# EAGLE board subwoofer_TDA2030Ax2 (EAGLE 6.0)
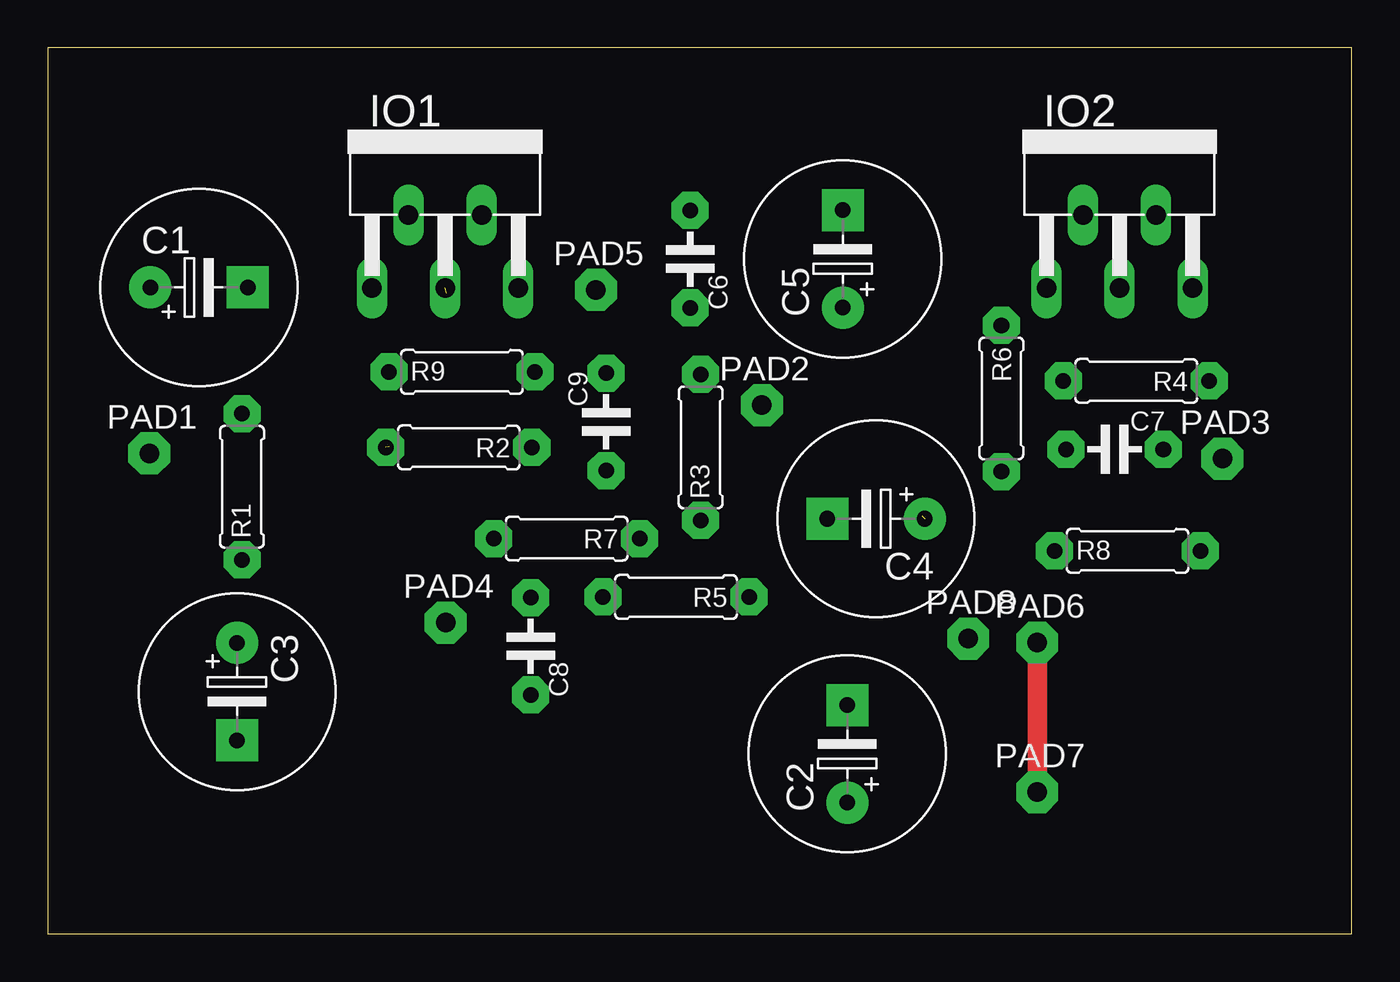
[diagram p0: board, top side]
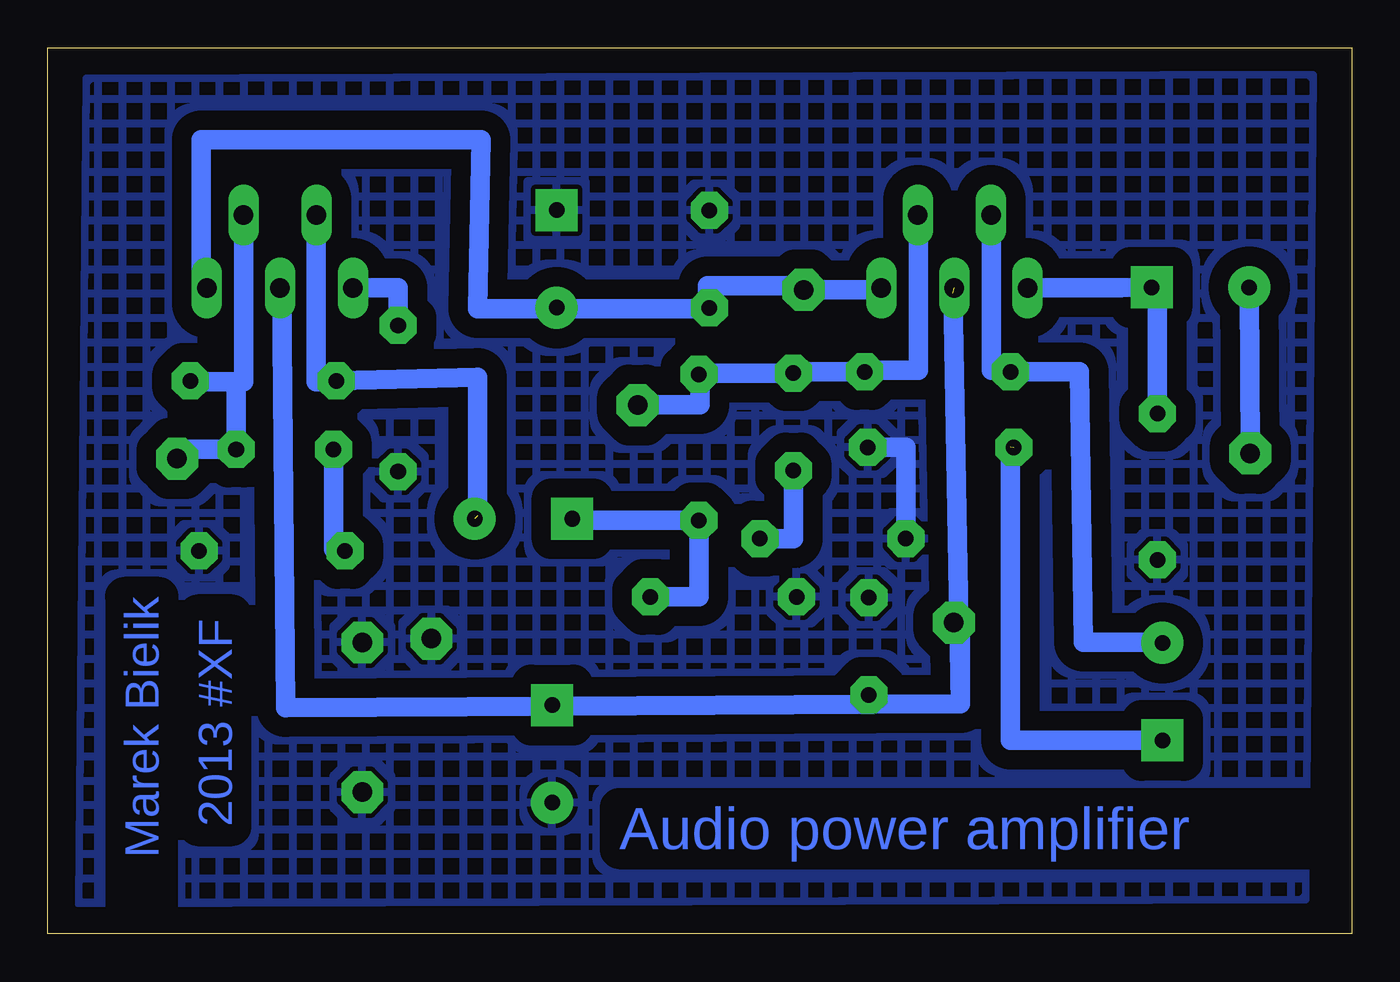
[diagram p1: board, bottom side, seen from below]

Size 68 x 46.2 mm. Coordinates in mm from the lower left corner, seen from the top.
Outline: 0,0 68,0 68,46.2 0,46.2 0,0
Copper layers (1*16): Top 0.035mm / dielectric 1.5mm / Bottom 0.035mm
Design rules: minimum track width 10mil, minimum drill 24mil, track to track 8mil, track to pad 8mil, pad to pad 8mil, via to via 8mil, smd to smd 8mil, copper to edge 40mil, drill to drill 8mil, minimum pad ring 10mil, minimum via ring 8mil, stop-mask expansion 4mil, vias tented up to drill 0mil, thermal gap 10mil

## Footprints (pad centres in the part's own frame; a part is rotated, then mirrored left to right if it is on the bottom)
C-EL_5 = drill 0.813 pad 2.184: C+ -2.54,0 | drill 0.813 pad 2.184 square: C- 2.54,0
C-5 = drill 0.813 pad 1.93 octagon: 1 -2.54,0; 2 2.54,0
PENTAWAT = drill 1.016 pad 1.6 long: 1 -3.81,-3.81; 2 -1.905,0; 3 0,-3.81; 4 1.905,0; 5 3.81,-3.81
PAD_1 = drill 1.016 pad 2.184 octagon: 1 0,0
R-7,5 = drill 0.813 pad 1.93 octagon: 1 -3.81,0; 2 3.81,0

## Placement (x,y rotation side)
C1  [C-EL_5]  7.88,33.71 0 top
C2  [C-EL_5]  41.7,9.39 90 top
C3  [C-EL_5]  9.87,12.63 270 top
C4  [C-EL_5]  43.2,21.65 180 top
C5  [C-EL_5]  41.46,35.2 90 top
C6  [C-5]  33.5,35.19 270 top
C7  [C-5]  55.64,25.27 0 top
C8  [C-5]  25.19,15 270 top
C9  [C-5]  29.12,26.7 90 top
IO1  TDA2030  [PENTAWAT]  20.72,37.5 0 top
IO2  TDA2030  [PENTAWAT]  55.9,37.5 0 top
PAD1  PAD_1  [PAD_1]  5.28,25.06 0 top
PAD2  PAD_1  [PAD_1]  37.24,27.58 0 top
PAD3  PAD_1  [PAD_1]  61.26,24.78 0 top
PAD4  PAD_1  [PAD_1]  20.75,16.24 0 top
PAD5  PAD_1  [PAD_1]  28.58,33.59 0 top
PAD6  PAD_1  [PAD_1]  51.6,15.2 0 top
PAD7  PAD_1  [PAD_1]  51.6,7.4 0 top
PAD8  PAD_1  [PAD_1]  48,15.4 0 top
R1  [R-7,5]  10.12,23.32 90 top
R2  [R-7,5]  21.43,25.37 180 top
R3  [R-7,5]  34.05,25.37 90 top
R4  [R-7,5]  56.77,28.84 180 top
R5  [R-7,5]  32.76,17.57 180 top
R6  [R-7,5]  49.73,27.92 270 top
R7  [R-7,5]  27.06,20.62 180 top
R8  [R-7,5]  56.31,19.98 0 top
R9  [R-7,5]  21.6,29.31 0 top

## Library data of the parts
C1-C9 IO1 IO2 PAD1-PAD8 R1-R9 = #PaJa_30

## Nets
0V: C2.C+ C5.C- C6.1 C8.1 PAD6.1 PAD7.1 PAD8.1 R1.1 R2.1 R5.2 R6.2 R7.2 R8.2
N$1: C1.C+ PAD1.1
N$2: C1.C- IO1.1 R1.2
N$3: C9.1 R7.1
N$4: C3.C+ IO1.2 R9.1
N$5: C3.C- R2.2
N$6: C4.C- R3.1 R5.1
N$7: C7.1 R8.1
N$8: C4.C+ IO2.2 R4.2
N$9: C9.2 IO1.4 PAD2.1 R3.2 R9.2
N$10: C7.2 IO2.4 PAD3.1 R4.1
N$12: C2.C- C8.2 IO1.3 IO2.3 PAD4.1
N$14: IO2.1 R6.1
N$15: C5.C+ C6.2 IO1.5 IO2.5 PAD5.1

## Tracks (layer width: path | path; a pad name or v marks a point on that pad's centre or on a via)
0V
  Top 1.016: PAD7.1 PAD6.1
  Bottom 1.016: R2.1 23.25,25.37 R7.2
  pour Bottom (isolate 1.016, hatched): 2,44.8 66,44.6 66.4,1.6 2.4,1.8
N$1
  Bottom 1.016: PAD1.1 5.34,33.66 C1.C+
N$2
  Bottom 1.016: IO1.1 12.02,33.69 C1.C- 10.12,33.71 R1.2
N$3
  Bottom 1.016: R7.1 29.12,20.62 C9.1
N$4
  Bottom 1.016: IO1.2 18.8,29.4 17.79,29.4 R9.1 14.2,29.31 14,15.2 9.87,15.2 C3.C+
N$5  (1 unrouted)
  Bottom 1.016: C3.C- 17.8,10.09 17.8,25.4
N$6
  Bottom 1.016: R5.1 34.05,17.57 R3.1 40.65,21.56 C4.C-
N$7
  Bottom 1.016: C7.1 53.1,20.07 R8.1
N$8  (1 unrouted)
  Bottom 1.016: IO2.2 54,28.8 52.96,28.8 R4.2 45.6,29.04 45.6,21.8
N$9
  Bottom 1.016: IO1.4 22.6,37.5 22.6,29.4 25.41,29.4 R9.2 29.12,29.31 C9.2 34.05,29.24 R3.2 34,29.18 34,27.6 37.24,27.6 PAD2.1
N$10
  Bottom 1.016: IO2.4 57.8,28.8 58.18,28.8 | 58.18,28.8 60.58,28.8 R4.1 60.66,28.84 | PAD3.1 61.26,25.27 C7.2 58.18,28.8
N$12  (1 unrouted)
  Bottom 1.016: IO2.3 55.8,33.69 55.6,11.8 41.4,11.88 | 41.4,11.88 25,11.97 | 25,11.97 20.4,12 | 20.4,12 20.8,33.4 | PAD4.1 20.4,16.24 20.4,12 | C8.2 25,12.46 25,11.97 | C2.C- 41.4,11.93 41.4,11.88
N$14
  Bottom 1.016: IO2.1 49.73,33.69 R6.1
N$15
  Bottom 1.016: IO2.5 60,33.69 60,41.4 45.4,41.4 45.6,32.6 41.6,32.6 | C5.C+ 41.4,32.66 41.6,32.6 | 41.6,32.6 33.5,32.6 C6.2 33.6,32.65 33.6,33.8 28.58,33.8 PAD5.1 24.53,33.59 IO1.5

## Text on the board
Bottom: Marek Bielik | 2013 #XF | Audio power amplifier